# Altium PCB PCB Layout.PcbDoc
Units mm, origin at the board's own origin, x right, y up, seen from the top; angles counter-clockwise.
Board outline 152.4 x 101.6 mm, 2 copper layers (Top Layer, Bottom Layer); 104 components, 73 nets, 355 pads, 69 vias.
Unrouted connection lines stored in the file: 8.
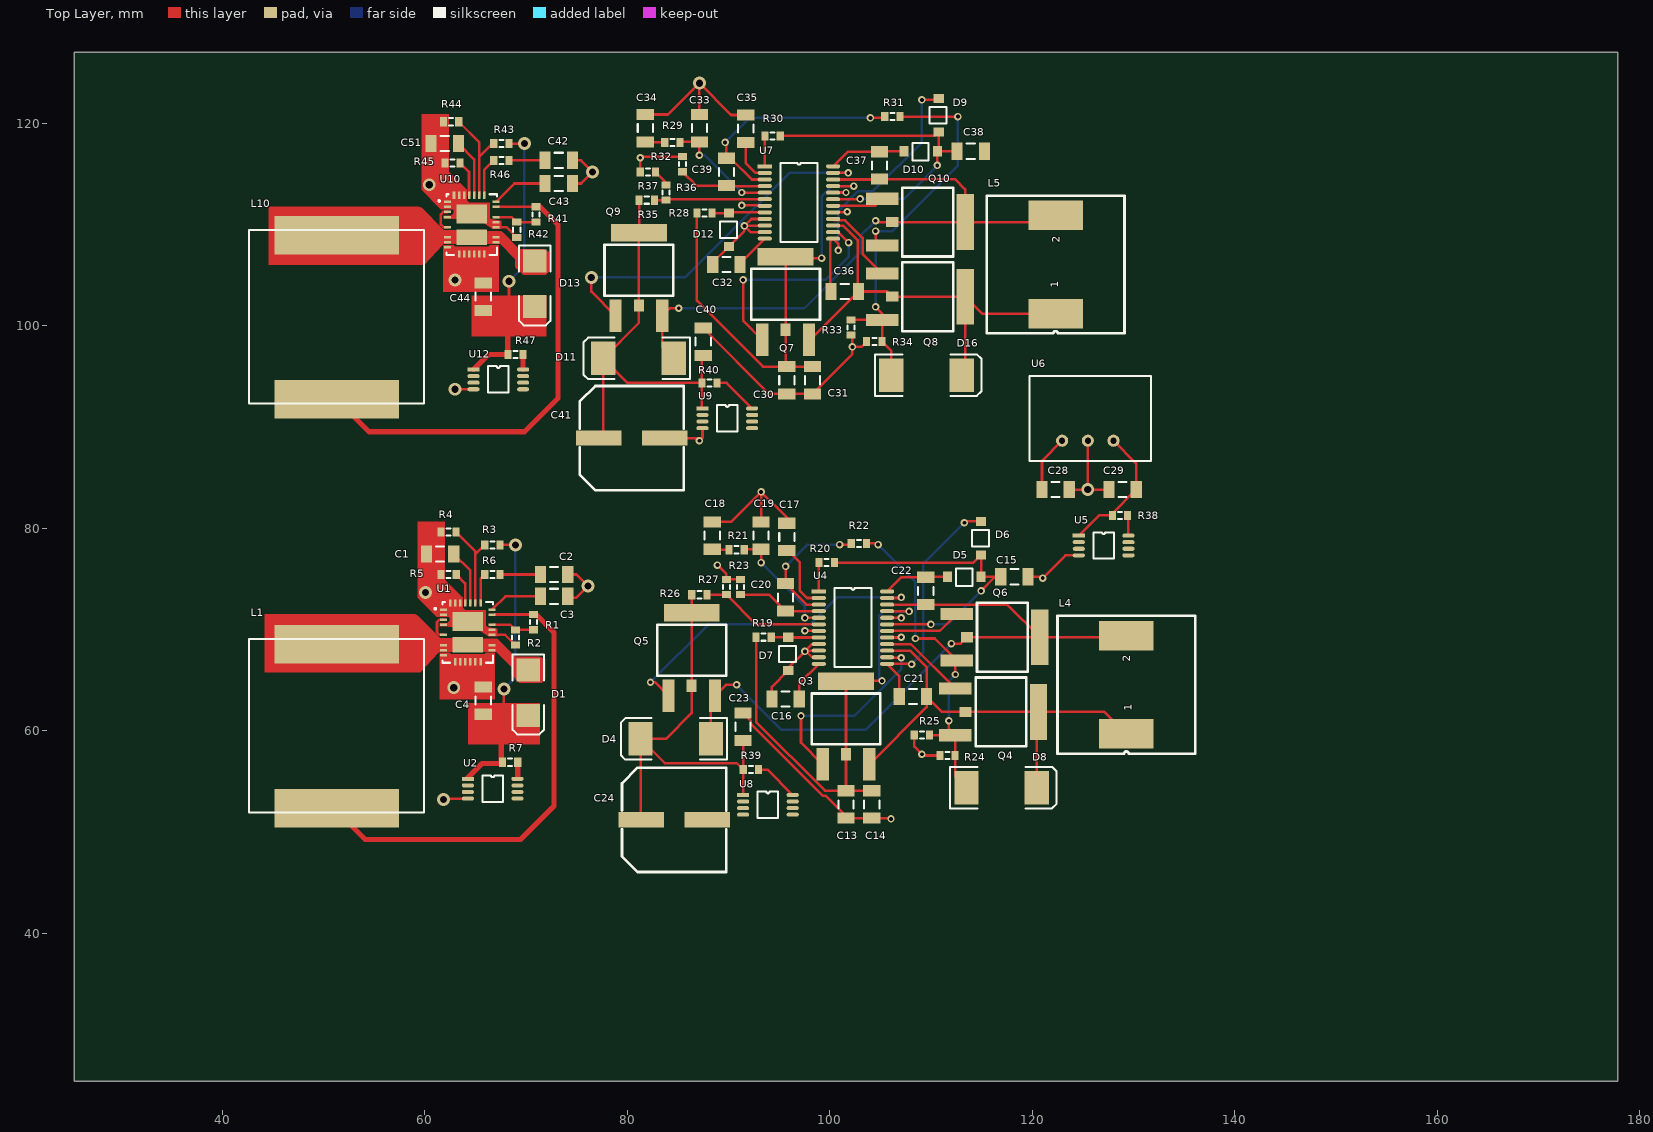
[diagram p0: Top Layer view]
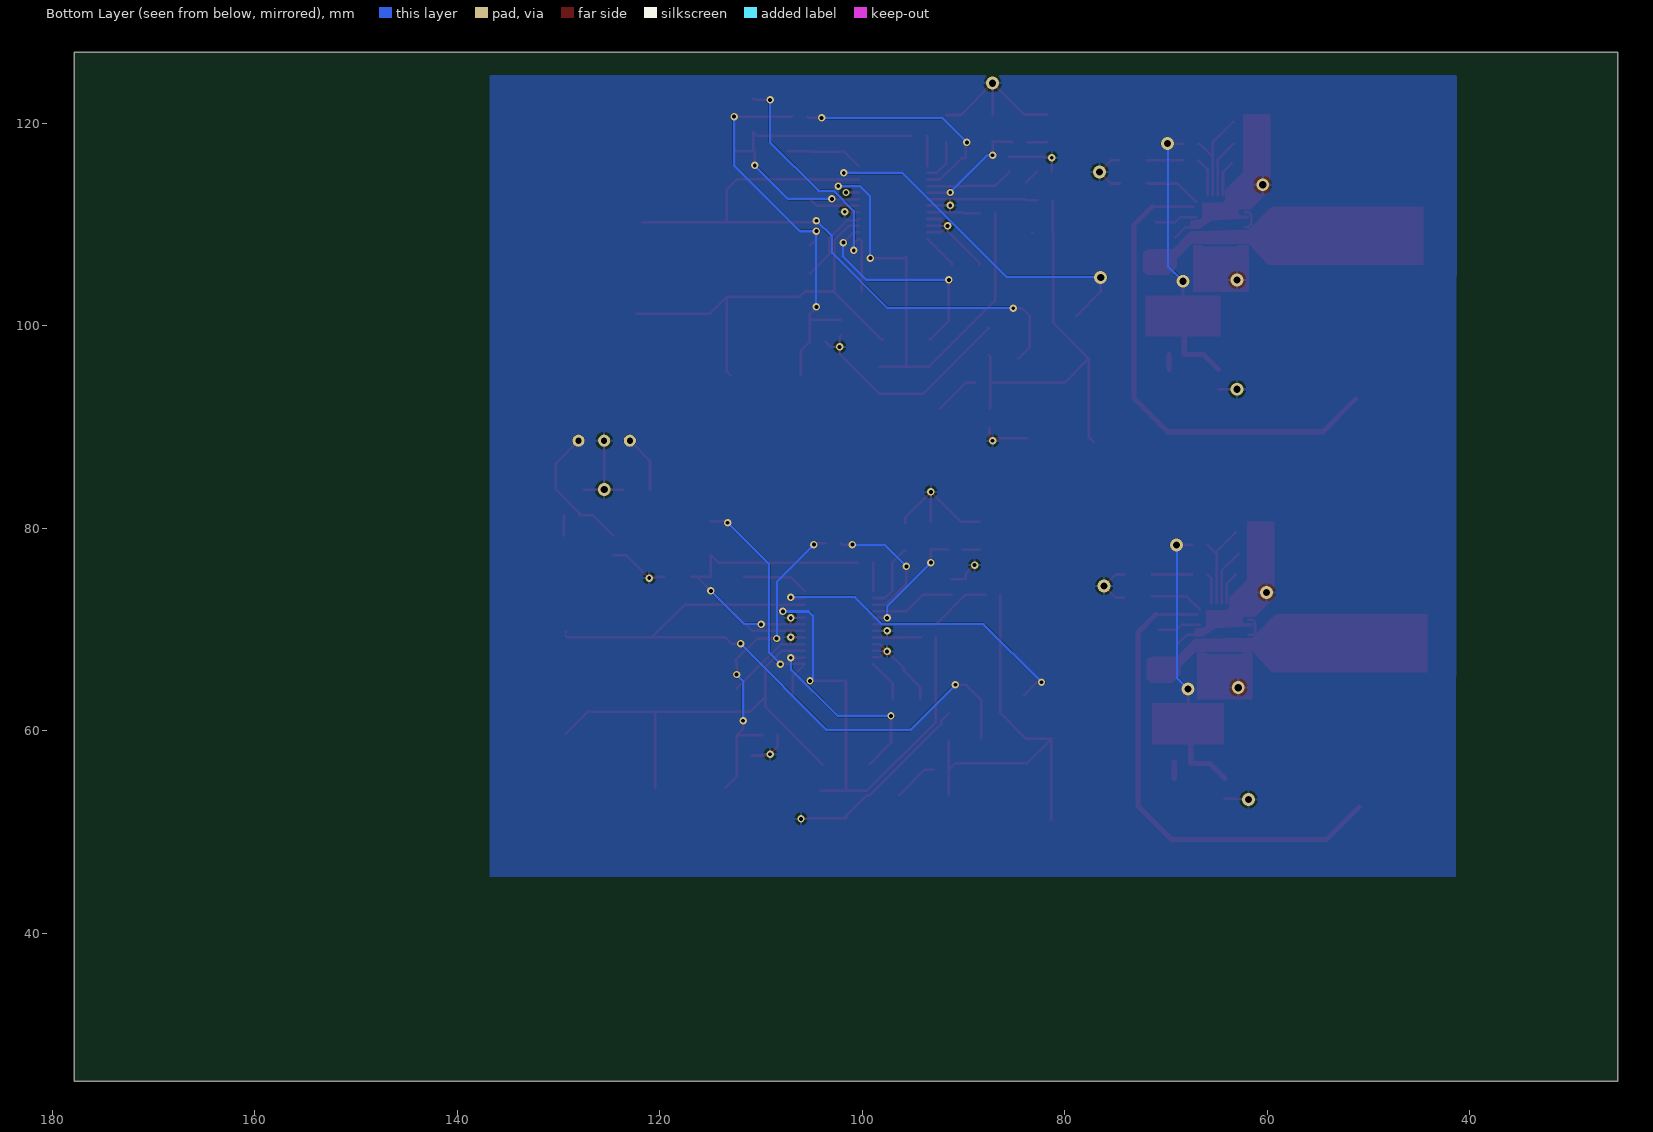
[diagram p1: Bottom Layer view, seen from below]

## Layer stack, top to bottom
Top Solder: solder mask 0.0102, Solder Resist, Dk 3.5
Top Layer: signal copper 0.0356
Dielectric 1: dielectric 0.32, FR-4, Dk 4.8
Bottom Layer: signal copper 0.0356
Bottom Solder: solder mask 0.0102, Solder Resist, Dk 3.5

## Board outline
25.4,25.4 177.8,25.4 177.8,127 25.4,127
cut-out: 55.753,122.047

## Design rules (kind name [scope] priority, off if disabled: settings)
Clearance [All] p1: gap=0 ignorepadtopadclearanceinfootprint=TRUE except(0.254: Arc-Arc Arc-Track Track-Track)
MinimumSolderMaskSliver [All] p1 off: minsoldermaskwidth=0.076
PolygonConnect [All] p1: connectstyle=Relief reliefconductorwidth=0.254 reliefentries=4 polygonreliefangle="90 Angle" airgapwidth=0.254
RoutingVias [All] p1: holewidth=0.711 width=1.27 viastyle="Through Hole" minholewidth=0.711 minwidth=1.27 maxholewidth=0.711 maxwidth=1.27
SilkToSolderMaskClearance [IsPad] p1 off: minsilkscreentomaskgap=0.254 clearancetoexposedcopper=TRUE
SolderMaskExpansion [All] p1: expansion=0.102
Width [All] p1: maxlimit=0.508 minlimit=0.254 preferedwidth=0.254 minimp=50.000000 maximp=50.000000 favimp=50.000000
28 further rules are at their usual default settings.

## Classes and differential pairs
component class 48V_Converter: C1 C2 C3 C4 D1 L1 R1 R2 R3 R4 R5 R6 R7 U1 U2
component class 19V_Converter: C30 C31 C32 C33 C34 C35 C36 C37 C38 C39 C40 C41 D9 D10 D11 D12 D16 L5 Q7 Q8 Q9 Q10 R28 R29 R30 R31 R32 R33 R34 R35 R36 R37 R40 U7 U9
component class 12V_Converter: C13 C14 C15 C16 C17 C18 C19 C20 C21 C22 C23 C24 D4 D5 D6 D7 D8 L4 Q3 Q4 Q5 Q6 R19 R20 R21 R22 R23 R24 R25 R26 R27 R39 U4 U8
component class 5V_Converter: C28 C29 R38 U5 U6
component class 48V_Converter_Sub: C42 C43 C44 C51 D13 L10 R41 R42 R43 R44 R45 R46 R47 U10 U12

## Components (designator, comment, footprint, x,y, rotation, side; value= is the part's Value field where it differs from the comment)
C1 "Cap Semi" C1206 61.515,77.47 r180 top value=0.01u
C2 "Cap Semi" C1206 72.771,75.438 r0 top value=0.01u
C3 "Cap Semi" C1206 72.771,73.279 r0 top value=4.7u
C4 "Cap Semi" C1206 65.786,62.992 r90 top value=10u
C13 "Cap Semi" C1206 101.6,52.735 r90 top value=27u
C14 "Cap Semi" C1206 104.14,52.735 r90 top value=3.3u
C15 "Cap Semi" C1206 118.237,75.214 r180 top value=4.7u
C16 "Cap Semi" C1206 95.631,63.149 r0 top value=0.001u
C17 "Cap Semi" C1206 95.758,79.151 r270 top value=0.001u
C18 "Cap Semi" C1206 88.392,79.278 r270 top value=0.01u
C19 "Cap Semi" C1206 93.218,79.278 r270 top value=100p
C20 "Cap Semi" C1206 95.631,73.182 r90 top value=100p
C21 "Cap Semi" C1206 108.204,63.403 r180 top value=0.22u
C22 "Cap Semi" C1206 109.474,73.817 r90 top value=0.22u
C23 "Cap Semi" C1206 91.44,60.402 r270 top value=22u
C24 "390u" PCV1E391MCL2GS 84.634,51.211 r90 top
C28 "10uF" C1206 122.301,83.82 r180 top
C29 "10uF" C1206 128.905,83.82 r0 top
C30 "Cap Semi" C1206 95.758,94.615 r90 top value=27u
C31 "Cap Semi" C1206 98.298,94.615 r90 top value=3.3u
C32 "Cap Semi" C1206 89.789,106.045 r0 top value=0.001u
C33 "Cap Semi" C1206 87.122,119.507 r270 top value=100p
C34 "Cap Semi" C1206 81.788,119.507 r270 top value=0.01u
C35 "Cap Semi" C1206 91.694,119.46 r270 top value=0.001u
C36 "Cap Semi" C1206 101.473,103.378 r180 top value=0.22u
C37 "Cap Semi" C1206 104.902,115.824 r90 top value=0.22u
C38 "Cap Semi" C1206 113.919,117.221 r180 top value=4.7u
C39 "Cap Semi" C1206 89.789,115.189 r90 top value=100p
C40 "Cap Semi" C1206 87.503,98.425 r270 top value=22u
C41 "390u" PCV1E391MCL2GS 80.443,88.9 r90 top
C42 "Cap Semi" C1206 73.232,116.332 r0 top value=0.01u
C43 "Cap Semi" C1206 73.232,114.046 r0 top value=4.7u
C44 "Cap Semi" C1206 65.786,102.87 r90 top value=10u
C51 "Cap Semi" C1206 61.976,117.983 r180 top value=0.01u
D1 "MBRS360" SMB 70.231,63.754 r270 top
D4 "MBRS340" SMC 84.79,59.212 r180 top
D5 "MMSZ5230B" MMSZ5230B 113.284,75.214 r180 top
D6 "MMSZ5230B" MMSZ5230B 114.935,79.024 r90 top
D7 "MMSZ5230B" MMSZ5230B 95.885,67.594 r90 top
D8 "MBRS340" SMC 116.967,54.386 r0 top
D9 "MMSZ5230B" MMSZ5230B 110.744,120.777 r90 top
D10 "MMSZ5230B" MMSZ5230B 108.966,117.221 r180 top
D11 "MBRS340" SMC 81.107,96.774 r180 top
D12 "MMSZ5230B" MMSZ5230B 90.043,109.474 r90 top
D13 "MBRS360" SMB 70.866,104.14 r270 top
D16 "MBRS340" SMC 109.555,95.123 r0 top
L1 "IHLP-6767DZ-11" IHLP-6767DZ-11 51.308,60.452 r90 top
L4 "SRR1240-4R7MCT" SRR1240-4R7M 129.286,64.546 r90 top
L5 "SRR1240-4R7MCT" SRR1240-4R7M 122.301,106.045 r90 top
L10 "IHLP-6767DZ-11" IHLP-6767DZ-11 51.308,100.838 r90 top
Q3 "BUK6212-40C" BUK6212-40C 99.3,56.688 r0 top
Q4 "BUK6212-40C" BUK6212-40C 112.395,64.165 r270 top
Q5 "BUK6212-40C" BUK6212-40C 84.06,63.458 r0 top
Q6 "BUK6212-40C" BUK6212-40C 112.538,71.545 r270 top
Q7 "BUK6212-40C" BUK6212-40C 93.331,98.607 r0 top
Q8 "BUK6212-40C" BUK6212-40C 105.172,105.17 r270 top
Q9 "BUK6212-40C" BUK6212-40C 78.853,100.981 r0 top
Q10 "BUK6212-40C" BUK6212-40C 105.172,112.536 r270 top
R1 "Res3" J1-0603 70.739,70.727 r90 top value=392k
R2 "Res3" J1-0603 68.961,69.215 r90 top value=53.6k
R3 "Res3" J1-0603 66.675,78.359 r180 top value=464k
R4 "Res3" J1-0603 62.357,79.629 r180 top value=15.8k
R5 "Res3" J1-0603 62.369,75.438 r180 top value=41.2k
R6 "Res3" J1-0603 66.675,75.438 r0 top value=10k
R7 "Res3" J1-0603 68.441,56.896 r0 top value=10M
R19 "Res3" J1-0603 93.472,69.245 r180 top value=51k
R20 "Res3" J1-0603 99.695,76.611 r180 top value=100k
R21 "Res3" J1-0603 90.805,77.881 r0 top value=100k
R22 "Res3" J1-0603 102.87,78.516 r0 top value=100
R23 "Res3" J1-0603 91.186,74.198 r90 top value=100
R24 "Res3" J1-0603 111.633,57.561 r0 top value=0.018
R25 "Res3" J1-0603 109.093,59.593 r0 top value=0.018
R26 "Res3" J1-0603 87.122,73.436 r180 top value=113k
R27 "Res3" J1-0603 89.789,74.198 r270 top value=8.06k
R28 "Res3" J1-0603 87.63,111.125 r180 top value=51k
R29 "Res3" J1-0603 84.455,118.11 r0 top value=100k
R30 "Res3" J1-0603 94.361,118.745 r180 top value=100k
R31 "Res3" J1-0603 106.172,120.65 r0 top value=100
R32 "Res3" J1-0603 85.471,115.951 r90 top value=100
R33 "Res3" J1-0603 102.108,99.822 r90 top value=0.018
R34 "Res3" J1-0603 104.394,98.425 r0 top value=0.018
R35 "Res3" J1-0603 81.927,112.395 r180 top value=113k
R36 "Res3" J1-0603 83.82,113.157 r270 top value=1K
R37 "Res3" J1-0603 82.03,115.189 r0 top value=1K
R38 "Res3" J1-0603 128.651,81.28 r0 top value=5m
R39 "Res3" J1-0603 92.202,56.164 r0 top value=2.5m
R40 "Res3" J1-0603 88.126,94.361 r0 top value=2m
R41 "Res3" J1-0603 70.993,110.998 r90 top value=392k
R42 "Res43" J1-0603 69.088,109.474 r90 top value=53.6k
R43 "Res3" J1-0603 67.564,117.983 r180 top value=464k
R44 "Res3" J1-0603 62.611,120.142 r180 top value=15.8k
R45 "Res3" J1-0603 62.75,116.078 r180 top value=41.2k
R46 "Res3" J1-0603 67.564,116.332 r0 top value=10k
R47 "Res3" J1-0603 68.961,97.155 r0 top value=10M
U1 "LT3958EUHE#PBF" LT-UHE-36-V-UHE28MA_V 64.262,69.723 r0 top
U2 "AD8217" AD8217 64.262,55.26 r0 top
U4 "LTC3780EG#PBF" "LTC3780 24-Lead Plastic SSOP" 98.914,73.765 r0 top
U5 "AD8217" AD8217 124.587,79.278 r0 top
U6 "R-78E-0.5" R-78E-0.5 122.941,88.646 r0 top
U7 "LTC3780EG#PBF" "LTC3780 24-Lead Plastic SSOP" 93.58,115.742 r0 top
U8 "AD8217" AD8217 91.44,53.669 r0 top
U9 "AD8217" AD8217 87.429,91.836 r0 top
U10 "LT3958EUHE#PBF" LT-UHE-36-V-UHE28MA_V 64.643,109.982 r0 top
U12 "AD8217" AD8217 64.823,95.676 r0 top

## Footprints (in the part's own frame and the unit in brackets; to place one, negate y for a bottom-side part, rotate by r counter-clockwise, add the part's x,y. Pads: shape width x height; smd on the part's side, far side on the other; paste and mask are expansions set on the pad)
AD8217 [mm]
  rect 1.2x0.4 smd: 1(0,0)
  oval 1.2x0.4 smd: 2(0,-0.65) 3(0,-1.3) 4(0,-1.95) 5(4.9,-1.95) 6(4.9,-1.3) 7(4.9,-0.65) 8(4.9,0)
  silkscreen extent 1.43,-2.28 3.47,0.33
BUK6212-40C [mm]
  rect 1.2x3.2 smd: 1(0,0) 2(4.6,0)
  rect 1x1.2 smd: 3(2.3,1)
  rect 5.5x1.7 smd: 3(2.3,8.2)
  silkscreen extent -1.1,2 5.7,7
C1206 [mm] "Chip Capacitor, Body 3.2x1.6mm, IPC High Density"
  rect 1.1x1.7 smd: 1(-1.35,0) 2(1.35,0)
  silkscreen extent -0.4,-0.75 0.4,0.75, body extent -1.7,-0.9 1.7,0.9, height 1.3
IHLP-6767DZ-11 [mm] "Inductor"
  rect 3.825x12.32 smd: 1(-8.1,0) 2(8.1,0)
  silkscreen extent -8.51,-8.64 8.64,8.64
J1-0603 [mm] "Chip Resistor, Body 1.6x0.8mm, IPC High Density"
  rect 0.7x0.9 smd: 1(-0.75,0) 2(0.75,0)
  silkscreen extent -0.2,-0.35 0.2,0.35, body extent -0.85,-0.48 0.85,0.48, height 0.9
LT-UHE-36-V-UHE28MA_V [mm] "QFN, 28-Leads, Body 6x5mm, Pitch 0.5mm"
  rect 0.7x0.25 smd: 1(-2.4,2.25) 2(-2.4,1.75) 3(-2.4,1.25) 4(-2.4,0.75) 6(-2.4,-0.25) 8(-2.4,-1.25) 9(-2.4,-1.75) 10(-2.4,-2.25) 20(2.4,-1.75) 21(2.4,-1.25) 23(2.4,-0.25) 24(2.4,0.25) 25(2.4,0.75) 27(2.4,1.75) 28(2.4,2.25)
  rect 0.25x0.7 smd: 12(-1.25,-2.9) 13(-0.75,-2.9) 14(-0.25,-2.9) 15(0.25,-2.9) 16(0.75,-2.9) 17(1.25,-2.9) 30(1.25,2.9) 31(0.75,2.9) 32(0.25,2.9) 33(-0.25,2.9) 34(-0.75,2.9) 35(-1.25,2.9) 36(-1.75,2.9)
  rect 3x1.88 smd: 37(0,1.06)
  rect 3x1.53 smd: 38(0,-1.245)
  silkscreen extent -3.27,-3 2.5,3, body extent -2.5,-3 2.5,3, height 0.8
"LTC3780 24-Lead Plastic SSOP" [mm]
  rect 1.4x0.4 smd: 1(0,0)
  oval 1.4x0.4 smd: 2(0,-0.65) 3(0,-1.3) 4(0,-1.95) 5(0,-2.6) 6(0,-3.25) 7(0,-3.9) 8(0,-4.55) 9(0,-5.2) 10(0,-5.85) 11(0,-6.5) 12(0,-7.15) 13(6.75,-7.15) 14(6.75,-6.5) 15(6.75,-5.85) 16(6.75,-5.2) 17(6.75,-4.55) 18(6.75,-3.9) 19(6.75,-3.25) 20(6.75,-2.6) 21(6.75,-1.95) 22(6.75,-1.3) 23(6.75,-0.65) 24(6.75,0)
  silkscreen extent 1.53,-7.48 5.22,0.33
MMSZ5230B [mm]
  rect 0.9x1.025 smd: 1(-1.65,0) 2(1.65,0)
  silkscreen extent -0.8,-0.8 0.8,0.9
PCV1E391MCL2GS [mm]
  rect 1.5x4.5 smd: 1(0,3.25) 2(0,-3.25)
  silkscreen extent -5.15,-5.15 5.15,5.15
R-78E-0.5 [mm]
  round 1.2 hole 0.6: 1(0,0) 2(2.54,0) 3(5.075,0)
  silkscreen extent -3.2,-2 8.77,6.39
SMB [mm] "DO-214-AA/SMB; 2 C-Bend Leads; Body 5.3 x 3.6 mm, inc. leads (LxW)"
  rect 2.3x2.3 smd: 1(-2.25,0) 2(2.25,0)
  silkscreen extent -3.8,-1.55 4.1,1.55
SMC [mm] "DO-214-AB/SMC; 2 C-Bend Leads; Body 7.9 x 5.9 mm, inc. leads (LxW)"
  rect 2.4x3.3 smd: 1(-3.475,0) 2(3.475,0)
  silkscreen extent -5.07,-2.05 5.43,2.05
SRR1240-4R7M [mm]
  rect 2.9x5.4 smd: 1(-4.85,0) 2(4.85,0)
  silkscreen extent -6.8,-6.8 6.8,6.8

## Part data
C1 C2 C3 C4 C13 C14 C15 C16 C17 C18 C19 C20 C21 C22 C23 C30 C31 C32 C33 C34 C35 C36 C37 C38 C39 C40 C42 C43 C44 C51: "Capacitor (Semiconductor SIM Model)", LatestRevisionDate=29-May-2009, LatestRevisionNote="IPC-7351 Footprint Added.", PackageDescription="Chip Capacitor", PackageReference=C1206, Published=8-Jun-2000, Publisher="Altium Limited"
C24 C41: library part Alum_Cap
C28 C29: library part "Cap Semi", "Capacitor (Semiconductor SIM Model)", LatestRevisionDate=29-May-2009, LatestRevisionNote="IPC-7351 Footprint Added.", PackageDescription="Chip Capacitor", PackageReference=C1206, Published=8-Jun-2000, Publisher="Altium Limited"
D1 D13: library part "D Schottky", "Schottky Diode", Code_JEDEC=DO-214-AA, LatestRevisionDate=17-Jul-2002, LatestRevisionNote="Re-released for DXP Platform.", PackageDescription="DO-214-AA/SMB; 2 C-Bend Leads; Body 5.3 x 3.6 mm, inc. leads (LxW)", PackageReference=SMB, Published=8-Jun-2000, Publisher="Altium Limited"
D4 D8 D11 D16: library part Diode, "Default Diode", Code_JEDEC=DO-214-AB, LatestRevisionDate=17-Jul-2002, LatestRevisionNote="Re-released for DXP Platform.", PackageDescription="DO-214-AB/SMC; 2 C-Bend Leads; Body 7.9 x 5.9 mm, inc. leads (LxW)", PackageReference=SMC, PackageVersion=Sep-1996, Published=8-Jun-2000, Publisher="Altium Limited"
D7 D12 Q3 Q4 Q5 Q6 Q7 Q8 Q9 Q10: library part Component_1
L1 L10: "Shielded Inductor"
R1 R2 R3 R4 R5 R6 R7 R19 R20 R21 R22 R23 R24 R25 R26 R27 R28 R29 R30 R31 R32 R33 R34 R35 R36 R37 R38 R39 R40 R41 R43 R44 R45 R46 R47: "Resistor", LatestRevisionDate=29-May-2009, LatestRevisionNote="IPC-7351 Footprint Added.", PackageDescription="Chip Resistor", PackageReference=J1-0603, Published=8-Jun-2000, Publisher="Altium Limited"
R42: library part Res3, "Resistor", LatestRevisionDate=29-May-2009, LatestRevisionNote="IPC-7351 Footprint Added.", PackageDescription="Chip Resistor", PackageReference=J1-0603, Published=8-Jun-2000, Publisher="Altium Limited"
U1 U10: "High Input Voltage, Boost, Flyback, SEPIC and Inverting Converter, 36-pin QFN (UHE-36-UHE28MA), -40 to 125 degC, Pb-Free", Frequency Adjust Range="100kHz - 1MHz", Manufacturer="Linear Technology", Supplier Part Number 1=LT3958EUHE#PBF-ND, ComponentLink1Description="Manufacturer URL", ComponentLink1URL=http://www.linear.com/, ComponentLink2Description=Datasheet, ComponentLink2URL=http://cds.linear.com/docs/en/datasheet/3958f.pdf, ComponentLink3Description="Package Specification", ComponentLink3URL=http://cds.linear.com/docs/en/packaging/QFN_28_05-08-1836.pdf, Mounting Technology="Surface Mount", Number of Outputs=1, PackageDescription="28-Pin Plastic QFN, Body 5 x 6 mm, Pitch 0.5 mm", PackageReference=UHE-36, PackageVersion="Rev. D, 02/2012", PartNumber=LT3958EUHE#PBF, RoHS=TRUE, Supplier 1=Digi-Key, Supplier 2=Farnell, Supplier 3=Newark, Supplier Part Number 2=2294964, Supplier Part Number 3=78R8466
U2 U12: "Current Shunt Moniter"
U4: "Buck-boost Controller, Constant Frequency, Current Mode Control with Power Good Output, 24-pin SOP (G-24), -40 to 85 degC, Pb-Free", Frequency Sync Range="200kHz - 400kHz", Manufacturer="Linear Technology", Supplier Part Number 1=LTC3780EG#PBF-ND, ComponentLink1Description="Manufacturer URL", ComponentLink1URL=http://www.linear.com/, ComponentLink2Description=Datasheet, ComponentLink2URL=http://cds.linear.com/docs/en/datasheet/3780ff.pdf, ComponentLink3Description="Package Specification", ComponentLink3URL=http://cds.linear.com/docs/en/packaging/SSOP_24_05-08-1640.pdf, DatasheetVersion="Rev. F", Mounting Technology="Surface Mount", Number of Outputs=1, PackageDescription="24-Pin Plastic SSOP, Body 8.2 x 5.3 mm, Pitch 0.65 mm", PackageReference=G-24, PackageVersion=Jun-10, PartNumber=LTC3780EG#PBF, RoHS=TRUE, Supplier 1=Digi-Key, Supplier 2=Farnell, Supplier 3=Newark, Supplier Part Number 2=1273545, Supplier Part Number 3=56M8395
U5 U8 U9: library part Component_1, "Current Shunt Moniter"
U7: "Buck-boost Controller, Constant Frequency, Current Mode Control with Power Good Output, 24-pin SOP (G-24), -40 to 85 degC, Pb-Free", Frequency Sync Range="200kHz - 400kHz", Manufacturer="Linear Technology", PackageDesciption="24-Pin Plastic SSOP, Body 8.2 x 5.3 mm, Pitch 0.65 mm", Supplier Part Number 1=LTC3780EG#PBF-ND, ComponentLink1Description="Manufacturer URL", ComponentLink1URL=http://www.linear.com/, ComponentLink2Description=Datasheet, ComponentLink2URL=http://cds.linear.com/docs/en/datasheet/3780ff.pdf, ComponentLink3Description="Package Specification", ComponentLink3URL=http://cds.linear.com/docs/en/packaging/SSOP_24_05-08-1640.pdf, DatasheetVersion="Rev. F", Mounting Technology="Surface Mount", Number of Outputs=1, PackageReference=G-24, PackageVersion=Jun-10, PartNumber=LTC3780EG#PBF, RoHS=TRUE, Supplier 1=Digi-Key, Supplier 2=Farnell, Supplier 3=Newark, Supplier Part Number 2=1273545, Supplier Part Number 3=56M8395

## Via types
v1: diameter 0.737, hole 0.381, Top Layer to Bottom Layer, 54 vias
v2: diameter 1.27, hole 0.711, Top Layer to Bottom Layer, 15 vias

## Nets (pads, with @x,y where several pads share a name; then routed paths per layer and width w, separated by ;. In a path a pad name is that pad's centre, name@x,y a point inside that pad or via, vN(x,y) a via of type N, cw(c..) or ccw(c..) an arc to the next point about the centre after c; other vN are vias at no path point)
BG1: Q6.1 U4.18 | length 7.6
  Top Layer w0.254: U4.18 110.858,69.865 Q6.1
BG2: Q4.1 U4.16 | length 8.6
  Top Layer w0.254: U4.16 107.995,68.565 Q4.1
BG3: Q10.1 U7.18 | length 5.1
  Top Layer w0.254: U7.18 104.478,111.842 Q10.1
BG4: Q8.1 U7.16 | length 8
  Top Layer w0.254: U7.16 100.472,110.4 101.519,110.4 103.251,108.668 103.251,107.061 105.142,105.17 Q8.1
DQ9: C40.2 C41.1 D11.2 Q9.3 R35.2 R40.1 U9.1 | length 41.6
  Top Layer w0.254: C41.1@77.141,88.519 77.632,89.01 D11.2 ; Q9.3@81.153,109.181 81.153,101.981 81.153,100.295 D11.2 ; Q9.3@81.177,109.205 R35.2 ; Q9.3@83.185,109.181 Q9.3@83.209,109.205 ; U9.1 87.376,91.889 R40.1 ; C40.2 87.376,96.948 R40.1 ; D11.2 80.045,94.361 R40.1
DQ10: C37.1 D11.1 L5.2 Q9.2 Q10.3 U7.22 | length 64.4
  Top Layer w0.254: D11.1 83.453,97.903 Q9.2 84.199,101.727 v1(85.09,101.727) ; U7.22 104.87,114.442 C37.1 112.348,114.474 113.372,113.45 Q10.3@113.372,110.236 ; v1(104.521,110.363) 104.648,110.236 106.172,110.236 Q10.3@113.372,110.236 ; L5.2@121.642,110.236 Q10.3@113.372,110.236
  Bottom Layer w0.254: v1(85.09,101.727) 97.492,101.727 102.997,107.232 102.997,108.839 v1(104.521,110.363)
GND: C1.2 C2.2 C3.2 C4.2 C13.1 C14.1 C15.1 C16.1 C17.1 C18.1 C19.1 C23.1 C24.2 C28.1 C29.1 C30.1 C31.1 C32.1 C33.1 C34.1 C35.1 C38.1 C40.1 C41.2 C42.2 C43.2 C44.2 C51.2 D7.1 D12.1 R2.1 R4.2 R5.2 R23.2 R24.1 R25.1 R27.1 R32.2 R33.1 R34.1 R37.1 R42.1 R44.2 R45.2 U1.1 U1.2 U1.4 U1.10 U1.12 U1.13 U1.14 U1.15 U1.16 U1.17 U1.23 U1.24 U1.34 U1.35 U1.36 U1.37 U2.4 U4.7 U4.9 U4.10 U4.11 U4.17 U4.20 U5.4 U6.2 U7.7 U7.9 U7.10 U7.11 U7.17 U7.20 U8.4 U9.4 U10.1 U10.2 U10.4 U10.10 U10.12 U10.13 U10.14 U10.15 U10.16 U10.17 U10.23 U10.24 U10.34 U10.35 U10.36 U10.37 U12.4 | length 153.8
  Top Layer w0.254: v2(61.849,53.213) 61.946,53.31 U2.4 ; v2(62.992,93.726) U12.4 ; U1.23 67.953,69.473 R2.1 ; U10.23 68.08,109.732 R42.1 ; C3.2@74.121,73.152 74.977,73.152 v2(76.12,74.295) 74.977,75.438 C2.2 ; C43.2 75.438,114.046 v2(76.581,115.189) 75.438,116.332 C42.2 ; R37.1 v1(81.28,116.586) 81.395,116.701 R32.2 ; C34.1 84.027,120.857 v2(87.122,123.952) ; C41.2 86.868,88.9 v1(87.122,88.646) 87.429,88.953 U9.4 ; C33.1 v2(87.122,123.952) ; C40.1 94.013,93.265 C30.1 C31.1 102.235,97.202 v1(102.235,97.917) ; C18.1 90.25,80.628 v1(93.218,83.596) ; C32.1 88.439,106.22 D12.1 91.567,109.348 v1(91.567,109.855) ; v1(88.9,76.357) 89.789,75.468 R27.1 R23.2 ; v1(91.313,111.887) 93.535,111.887 U7.7 ; C23.1 92.214,60.978 92.214,60.676 99.313,53.577 99.615,53.577 101.6,51.592 C13.1 C14.1 105.968,51.385 v1(106.045,51.308) ; C35.1 90.264,120.81 v2(87.122,123.952) ; C19.1 v1(93.218,83.596) ; U7.11 92.18,109.242 v1(91.567,109.855) ; U7.10 v1@91.604,109.892 ; U7.9 92.254,110.542 v1@91.604,109.892 ; C16.1 94.281,64.34 D7.1 95.885,66.197 v1(97.536,67.848) ; C17.1 95.758,81.056 v1(93.218,83.596) ; v1(97.536,69.88) 97.551,69.865 U4.7 ; U4.11 98.253,67.265 v1@97.603,67.915 ; U4.10 v1@97.603,67.915 ; U4.9 98.253,68.565 v1@97.603,67.915 ; U7.17 101.667,111.192 v1(101.727,111.252) ; U7.20 100.345,113.157 v1(101.6,113.157) ; R33.1 102.235,98.945 v1(102.235,97.917) ; R34.1 103.136,97.917 v1(102.235,97.917) ; U4.17 107.031,69.215 v1(107.061,69.245) ; U4.20 107.046,71.165 v1(107.061,71.15) ; R25.1 108.343,58.438 v1(109.093,57.688) 109.22,57.561 R24.1 ; C15.1 120.904,75.214 v1(121.031,75.087) 123.272,77.328 U5.4 ; C28.1 v2(125.476,83.82) ; U6.2 125.481,83.825 v2(125.476,83.82) ; C29.1 v2(125.476,83.82) ; v1(91.567,109.855) v1@91.604,109.892
  other v2: 62.865,64.262 60.071,73.66 62.992,104.521 60.452,113.919
NetC1_1: C1.1 U1.32 | length 5.5
  Top Layer w0.254: C1.1 64.504,75.831 U1.32@64.504,72.623
NetC2_1: C2.1 R6.2 | length 4
  Top Layer w0.254: R6.2 C2.1
NetC3_1: C3.1 U1.28 | length 5.3
  Top Layer w0.254: U1.28 67.968,73.279 C3.1
NetC4_1: C4.1 D1.2 R3.1 R7.1 U2.1 | length 24.3
  Top Layer w0.254: R3.1 v2(68.961,78.359) ; 67.818,62.484 v2(67.818,64.135)
  Top Layer w0.508: U2.1@64.188,55.29 65.667,56.769 R7.1@67.576,56.769 ; R7.1@67.564,56.781 67.564,59.182
  Bottom Layer w0.254: v2(67.818,64.135) 68.961,65.278 v2(68.961,78.359)
NetC13_2: C13.2 C14.2 C28.2 C30.2 C31.2 Q3.3 Q7.3 R19.2 R28.2 U4.21 U6.1 U7.21 | length 103.4
  Top Layer w0.254: R28.2 86.88,102.477 93.392,95.965 C30.2 ; R19.2 92.722,60.886 99.523,54.085 C13.2 ; C31.2 C30.2 ; v1(99.187,106.68) 95.758,106.68 95.631,106.807 95.631,99.607 95.631,96.092 C30.2 ; U7.21 v1(102.362,113.792) ; C14.2 C13.2 ; v1(105.156,64.927) 101.639,64.927 101.6,64.888 101.6,57.688 C13.2 ; U4.21 107.793,71.815 v1(107.823,71.785) ; C28.2 120.951,86.656 U6.1
  Bottom Layer w0.254: v1(99.187,106.68) 99.187,112.776 100.203,113.792 v1(102.362,113.792) ; v1(105.156,64.927) 104.902,65.181 104.902,71.404 105.283,71.785 v1(107.823,71.785)
NetC15_2: C15.2 D5.1 D6.1 R20.1 U4.19 | length 31.5
  Top Layer w0.254: R20.1 114.172,76.611 D6.1 D5.1 D5.1 116.332,75.214 ; U4.19 v1(109.982,70.515) ; v1(114.935,73.817) 116.332,75.214 ; C15.2 116.332,75.214
  Bottom Layer w0.254: v1(109.982,70.515) 111.633,70.515 v1(114.935,73.817)
NetC16_2: C16.2 U4.12 | length 4.3
  Top Layer w0.254: C16.2 96.981,64.682 U4.12
NetC17_2: C17.2 U4.2 | length 6.7
  Top Layer w0.254: C17.2 95.885,77.801 97.028,76.658 97.028,73.853 97.766,73.115 U4.2
NetC18_2: C18.2 R21.1 | length 1.7
  Top Layer w0.254: C18.2 88.439,77.881 R21.1
NetC19_2: C19.2 R21.2 U4.5 | length 11.6
  Top Layer w0.254: R21.2 91.602,77.928 C19.2 v1(93.218,76.611) ; v1(97.536,71.15) 97.551,71.165 U4.5
  Bottom Layer w0.254: v1(93.218,76.611) 97.536,72.293 v1(97.536,71.15)
NetC20_1: C20.1 R23.1 U4.4 | length 8.4
  Top Layer w0.254: R23.1 94.015,73.448 C20.1 95.648,71.815 U4.4
NetC20_2: C20.2 R22.1 U4.3 | length 13.3
  Top Layer w0.254: v1(95.631,76.23) C20.2 97.698,72.465 U4.3 ; v1(100.965,78.389) 101.993,78.389 R22.1
  Bottom Layer w0.254: v1(95.631,76.23) 97.79,78.389 v1(100.965,78.389)
NetC21_1: C21.1 D8.2 L4.1 Q3.2 Q4.3 U4.15 | length 45.3
  Top Layer w0.254: Q3.2 109.554,62.342 C21.1 ; U4.15 107.927,67.915 109.554,66.288 C21.1 ; D8.2 120.442,61.712 Q4.3@120.595,61.865 ; L4.1 127.117,61.865 Q4.3@120.595,61.865 ; C21.1 111.092,61.865 113.395,61.865 Q4.3@120.595,61.865
NetC21_2: C21.2 D6.2 U4.13 | length 24
  Top Layer w0.254: C21.2 106.854,65.425 U4.13 108.04,66.615 v1(108.077,66.578) ; v1(113.284,80.548) 113.41,80.674 D6.2
  Bottom Layer w0.254: v1(108.077,66.578) 109.22,67.721 109.22,76.484 v1(113.284,80.548)
NetC22_1: C22.1 D4.1 L4.2 Q5.2 Q6.3 U4.22 | length 67.6
  Top Layer w0.254: D4.1 88.265,63.063 Q5.2 89.748,64.546 v1(90.805,64.546) ; U4.22 109.472,72.465 C22.1 117.516,72.467 Q6.3@120.738,69.245 ; v1(112.014,68.61) 112.903,68.61 113.538,69.245 Q6.3@120.738,69.245 ; L4.2@129.262,69.753 L4.2@129.286,69.777 ; L4.2 129.135,69.245 Q6.3@120.738,69.245
  Bottom Layer w0.254: v1(90.805,64.546) 95.25,60.101 103.505,60.101 v1(112.014,68.61)
NetC22_2: C22.2 D5.2 U4.24 | length 6.6
  Top Layer w0.254: U4.24 107.066,75.167 C22.2 109.521,75.214 D5.2
NetC23_2: C23.2 C24.1 D4.2 Q5.3 R26.2 R39.1 U8.1 | length 42.6
  Top Layer w0.254: C24.1 81.315,51.28 D4.2 ; R26.2 86.372,71.67 86.36,71.658 86.36,64.458 86.36,61.752 83.82,59.212 D4.2 ; U8.1 91.452,53.681 R39.1 R39.1@91.44,56.176 ; C23.2 R39.1@91.44,56.176 ; D4.2 83.728,56.799 90.817,56.799 R39.1@91.44,56.176
NetC29_2: C29.2 R38.1 U5.1 U6.3 | length 13.4
  Top Layer w0.254: U5.1 126.589,81.28 R38.1 127.901,81.466 C29.2 130.255,86.407 U6.3
NetC32_2: C32.2 U7.12 | length 3.6
  Top Layer w0.254: C32.2 91.139,106.151 U7.12
NetC33_2: C33.2 R29.2 U7.5 | length 11.2
  Top Layer w0.254: R29.2 85.252,118.157 C33.2 v1(87.122,116.84) ; v1(91.313,113.157) 91.328,113.142 U7.5
  Bottom Layer w0.254: v1(87.122,116.84) 87.63,116.84 v1(91.313,113.157)
NetC34_2: C34.2 R29.1 | length 1.9
  Top Layer w0.254: C34.2 81.835,118.11 R29.1
NetC35_2: C35.2 U7.2 | length 4.3
  Top Layer w0.254: C35.2 91.694,116.078 92.68,115.092 U7.2
NetC36_1: C36.1 D16.2 L5.1 Q7.2 Q8.3 U7.15 | length 43.2
  Top Layer w0.254: Q7.2 98.052,98.607 C36.1 105.664,103.378 106.172,102.87 Q8.3@113.372,102.87 ; U7.15 101.309,109.892 102.743,108.458 C36.1@102.743,103.378 ; D16.2 113.372,95.465 Q8.3@113.372,102.87 ; L5.1 115.047,101.195 Q8.3@113.372,102.87
NetC36_2: C36.2 D9.2 U7.13 | length 27.5
  Top Layer w0.254: C36.2@100.043,103.378 100.043,108.305 U7.13 100.838,108.084 v1(100.838,107.442) ; v1(109.093,122.301) 110.618,122.301 D9.2
  Bottom Layer w0.254: v1(100.838,107.442) 100.838,111.335 102.787,113.284 104.267,113.284 109.093,118.11 v1(109.093,122.301)
NetC37_2: C37.2 D10.2 U7.24 | length 7.6
  Top Layer w0.254: U7.24 101.762,117.174 C37.2 104.949,117.221 D10.2
NetC38_2: C38.2 D9.1 D10.1 R30.1 U7.19 | length 32.8
  Top Layer w0.254: R30.1 110.362,118.745 D9.1 110.744,117.349 D10.1 ; U7.19 102.967,112.492 v1(102.997,112.522) ; v1(110.617,115.824) v1(110.617,115.824) D10.1 ; C38.2@112.569,117.348 112.442,117.221 D10.1
  Bottom Layer w0.254: v1(102.997,112.522) 107.315,112.522 v1(110.617,115.824)
NetC39_1: C39.1 R32.1 U7.4 | length 8.7
  Top Layer w0.254: R32.1 86.833,113.839 C39.1 89.836,113.792 U7.4
NetC39_2: C39.2 R31.1 U7.3 | length 23.1
  Top Layer w0.254: v1(89.662,118.11) 89.789,117.983 C39.2 90.217,116.539 92.314,114.442 U7.3 ; v1(104.013,120.523) 105.295,120.523 R31.1
  Bottom Layer w0.254: v1(89.662,118.11) 92.075,120.523 v1(104.013,120.523)
NetC42_1: C42.1 R46.2 | length 3.6
  Top Layer w0.254: R46.2 C42.1
NetC43_1: C43.1 U10.28 | length 5.6
  Top Layer w0.254: U10.28 68.857,114.046 C43.1
NetC44_1: C44.1 D13.2 R43.1 R47.1 U12.1 | length 24.2
  Top Layer w0.254: R47.1@68.199,97.167 R47.1 ; R43.1 v2(69.85,117.983) ; 68.326,102.362 v2(68.326,104.394) ; D13.2@70.83,101.89 D13.2
  Top Layer w0.508: U12.1 66.302,97.155 R47.1 ; R47.1@68.199,97.167 68.199,99.568
  Bottom Layer w0.254: v2(68.326,104.394) 69.85,105.918 v2(69.85,117.983)
NetC51_1: C51.1 U10.32 | length 5.7
  Top Layer w0.254: C51.1 64.885,116.424 U10.32@64.885,112.882
NetD1_1: D1.1 L1.2 U1.8 U1.9 U1.20 U1.21 U1.38
NetD7_2: D7.2 R19.1 U4.8 | length 4.7
  Top Layer w0.254: R19.1 94.223,69.244 D7.2 95.914,69.215 U4.8
NetD8_1: D8.1 Q4.2 Q6.2 R22.2 R24.2 R25.2 | length 33.2
  Top Layer w0.254: R22.2 104.648,78.516 v1(104.775,78.389) ; v1(108.458,69.118) 110.365,69.118 Q6.2 112.395,66.802 v1(112.395,65.562) ; R25.2 109.871,59.565 Q4.2 ; v1(111.76,60.99) 111.76,60.2 Q4.2 ; D8.1 112.383,55.495 R24.2 112.395,57.573 Q4.2
  Bottom Layer w0.254: v1(104.775,78.389) 108.458,74.706 v1(108.458,69.118) ; v1(111.76,60.99) 111.76,64.927 v1(112.395,65.562)
NetD13_1: D13.1 L10.2 U10.8 U10.9 U10.20 U10.21 U10.38
NetD16_1: D16.1 Q8.2 Q10.2 R31.2 R33.2 R34.2 | length 41
  Top Layer w0.254: R33.2 102.11,100.57 Q8.2 ; v1(104.521,101.854) 105.172,101.203 Q8.2 ; v1(104.521,109.347) 104.521,108.587 Q10.2 ; D16.1 106.08,97.489 R34.2 105.172,98.453 Q8.2 ; R31.2 v1(112.649,120.65)
  Bottom Layer w0.254: v1(104.521,101.854) v1(104.521,109.347) 106.172,109.347 112.649,115.824 v1(112.649,120.65)
NetR1_1: R1.1 R2.2 U1.25 | length 4.3
  Top Layer w0.254: U1.25 68.453,70.473 R2.2 68.973,69.977 R1.1
NetR3_2: R3.2 R4.1 U1.31 | length 9.1
  Top Layer w0.254: R4.1 65.012,77.724 65.012,77.446 ; U1.31 65.012,77.446 ; R3.2 65.012,77.446
NetR5_1: R5.1 U1.33 | length 3.2
  Top Layer w0.254: R5.1 63.996,74.561 U1.33@63.996,72.623
NetR6_1: R6.1 U1.30 | length 3
  Top Layer w0.254: U1.30@65.52,72.623 65.52,75.033 R6.1
NetR7_2: R7.2 R47.2 U2.8 U12.8 | length 3.1
  Top Layer w0.254: U2.8 U2.8@69.191,55.289 ; R47.2 R47.2@69.723,97.143
  Top Layer w0.508: U2.8@69.191,55.289 R7.2 ; U12.8 R47.2@69.723,97.143
NetR20_2: R20.2 U4.1 | length 2.9
  Top Layer w0.254: U4.1 98.914,76.58 R20.2
NetR26_1: R26.1 R27.2 U4.6 | length 12.3
  Top Layer w0.254: R26.1 87.884,73.448 R27.2 92.722,70.515 U4.6
NetR30_2: R30.2 U7.1 | length 3
  Top Layer w0.254: U7.1 93.58,118.714 R30.2
NetR35_1: R35.1 R36.2 U7.6 | length 10.9
  Top Layer w0.254: R35.1@82.689,112.407 R36.2 83.905,112.492 U7.6
NetR36_1: R36.1 R37.2 | length 1.5
  Top Layer w0.254: R37.2 R36.1@83.82,114.149
NetR38_2: R38.2 U5.8 | length 2
  Top Layer w0.254: R38.2 129.487,81.194 U5.8
NetR39_2: R39.2 U8.8 | length 4.4
  Top Layer w0.254: R39.2 93.845,56.164 U8.8
NetR40_2: R40.2 U9.8 | length 4.5
  Top Layer w0.254: R40.2 89.804,94.361 U9.8
NetR41_1: R41.1 R42.2 U10.25 | length 4.2
  Top Layer w0.254: U10.25 68.58,110.732 R42.2 70.969,110.224 R41.1
NetR43_2: R43.2 R44.1 U10.31 | length 10.1
  Top Layer w0.254: R44.1 65.393,118.11 65.393,116.701 ; U10.31 65.393,116.701 ; R43.2 66.675,117.983 65.393,116.701
NetR45_1: R45.1 U10.33 | length 3.6
  Top Layer w0.254: R45.1 64.377,115.201 U10.33@64.377,112.882
NetR46_1: R46.1 U10.30 | length 3.8
  Top Layer w0.254: U10.30@65.901,112.882 65.901,115.419 R46.1
NetU1_3: U1.3 U1.6 | length 2.5
  Top Layer w0.254: U1.6 61.464,69.473 61.214,69.723 61.214,70.739 61.448,70.973 U1.3
NetU2_5: U2.5 U12.5
NetU5_5: U5.5
NetU8_5: U8.5
NetU9_5: U9.5
NetU10_3: U10.3 U10.6 | length 2.5
  Top Layer w0.254: U10.6 61.845,109.732 61.595,109.982 61.595,110.998 61.829,111.232 U10.3
RUN: D12.2 R28.1 U7.8 | length 5.2
  Top Layer w0.254: R28.1 D12.2 D12.2 90.111,111.192 U7.8
TG1: Q5.1 U4.23 | length 32
  Top Layer w0.254: v1(82.296,64.8) 82.718,64.8 Q5.1 ; U4.23 106.994,73.115 v1(107.061,73.182)
  Bottom Layer w0.254: v1(82.296,64.8) 88.011,70.515 98.044,70.515 100.711,73.182 v1(107.061,73.182)
TG2: Q3.1 U4.14 | length 20
  Top Layer w0.254: v1(97.155,61.468) 97.155,58.833 Q3.1 ; U4.14 105.716,67.213 v1(107.061,67.213)
  Bottom Layer w0.254: v1(97.155,61.468) 102.415,61.468 107.061,66.114 v1(107.061,67.213)
TG3: Q9.1 U7.23 | length 35.9
  Top Layer w0.254: v2(76.454,104.775) 76.454,103.38 Q9.1 ; U7.23 v1(101.824,115.092)
  Bottom Layer w0.254: v2(76.454,104.775) 85.725,104.775 96.042,115.092 v1(101.824,115.092)
TG4: Q7.1 U7.14 | length 21.4
  Top Layer w0.254: v1(91.44,104.521) 91.44,100.498 Q7.1 ; U7.14 100.816,109.242 v1(101.854,108.204)
  Bottom Layer w0.254: v1(91.44,104.521) 99.568,104.521 101.854,106.807 v1(101.854,108.204)
VCC_14.8V: L1.1 L10.1 R1.2 R41.2 U1.27 U10.27 | length 96.2
  Top Layer w0.254: U1.27@66.896,71.489 R1.2@70.612,71.489 ; U10.27@67.277,111.748 R41.2 R41.2@71.386,111.748
  Top Layer w0.508: L1.1@50.927,52.479 54.13,49.276 69.469,49.276 72.771,52.578 72.771,69.723 R1.2@71.005,71.489 ; L10.1 54.511,89.535 69.85,89.535 73.152,92.837 73.152,109.982 R41.2@71.386,111.748
pads on no net: U2.2 U2.3 U2.6 U2.7 U5.2 U5.3 U5.6 U5.7 U8.2 U8.3 U8.6 U8.7 U9.2 U9.3 U9.6 U9.7 U12.2 U12.3 U12.6 U12.7

## Polygon pours and split planes (outlines as drawn)
no net on Top Layer "Top Layer-No Net" (solid, pour order 8): 59.944,106.68
no net on Top Layer "Top Layer-No Net 1" (solid, pour order 4): 48.895,111.125
no net on Top Layer "Top Layer-No Net 2" (solid, pour order 2): 58.801,106.299
no net on Top Layer "Top Layer-No Net 3" (solid, pour order 0): 58.039,106.426
GND on Bottom Layer "GND_L02_P014" (solid, pour order 14): 41.275,124.714 136.652,124.714 136.779,124.841 136.779,45.593 41.402,45.593
no net on Bottom Layer (solid, pour order 12): 141.732,50.292
no net on Bottom Layer (solid, pour order 10): 39.878,124.841

## Other copper
Top Layer:
  rectangle net NetC4_1: 64.262,58.674 71.374,62.738
  rectangle net NetC44_1: 64.643,98.933 72.009,102.997
  region net GND: 62.484,67.691 62.611,67.564 65.913,67.564 66.04,67.691 66.929,67.691 66.929,63.119 61.468,63.119 61.468,67.691
  region net GND: 59.309,73.152 61.214,71.247 62.357,71.247 62.484,71.12 62.484,70.866 62.23,70.612 61.468,70.612 61.468,70.34 65.109,70.132 66.294,69.342 67.183,69.342 67.183,70.104 66.294,70.231 66.04,70.358 66.04,71.882 64.008,71.882 63.754,72.136 63.754,73.152 61.976,74.93 61.976,80.645 59.309,80.645
  region net NetD1_1: 67.31,68.961 68.961,67.31 71.374,67.31 71.882,67.056 71.882,65.087 71.565,64.77 69.342,64.77 68.58,65.532 68.58,66.294 67.056,67.818 61.468,67.818 61.341,67.691 59.563,65.786 44.196,65.786 44.196,71.501 59.055,71.501 59.309,71.374 61.468,69.215 67.183,69.088
  region net GND: 59.69,113.411 61.595,111.506 62.738,111.506 62.865,111.379 62.865,111.125 62.611,110.871 61.849,110.871 61.849,110.599 65.49,110.391 66.675,109.601 67.564,109.601 67.564,110.363 66.675,110.49 66.421,110.617 66.421,112.141 64.389,112.141 64.135,112.395 64.135,113.411 62.357,115.189 62.357,120.904 59.69,120.904
  region net GND: 62.865,107.95 62.992,107.823 66.294,107.823 66.421,107.95 67.31,107.95 67.31,103.378 61.849,103.378 61.849,107.95
  region net NetD13_1: 67.691,109.22 69.342,107.569 71.755,107.569 72.263,107.315 72.263,105.346 71.946,105.029 69.723,105.029 68.961,105.791 68.961,106.553 67.437,108.077 61.849,108.077 61.722,107.95 59.944,106.045 44.577,106.045 44.577,111.76 59.436,111.76 59.69,111.633 61.849,109.474 67.564,109.347
Bottom Layer:
  region: 54.356,118.999

## Text inside footprints (layer, text, board x,y; h text height)
L4: Top Overlay "1" at 129.794,61.976 h0.76 r90; Top Overlay "1" at 122.555,103.759 h0.76 r90; Top Overlay "2" at 129.667,66.802 h0.76 r90
L5: Top Overlay "2" at 122.682,108.204 h0.76 r90